# EAGLE board stepone_v1 (EAGLE 6.4)
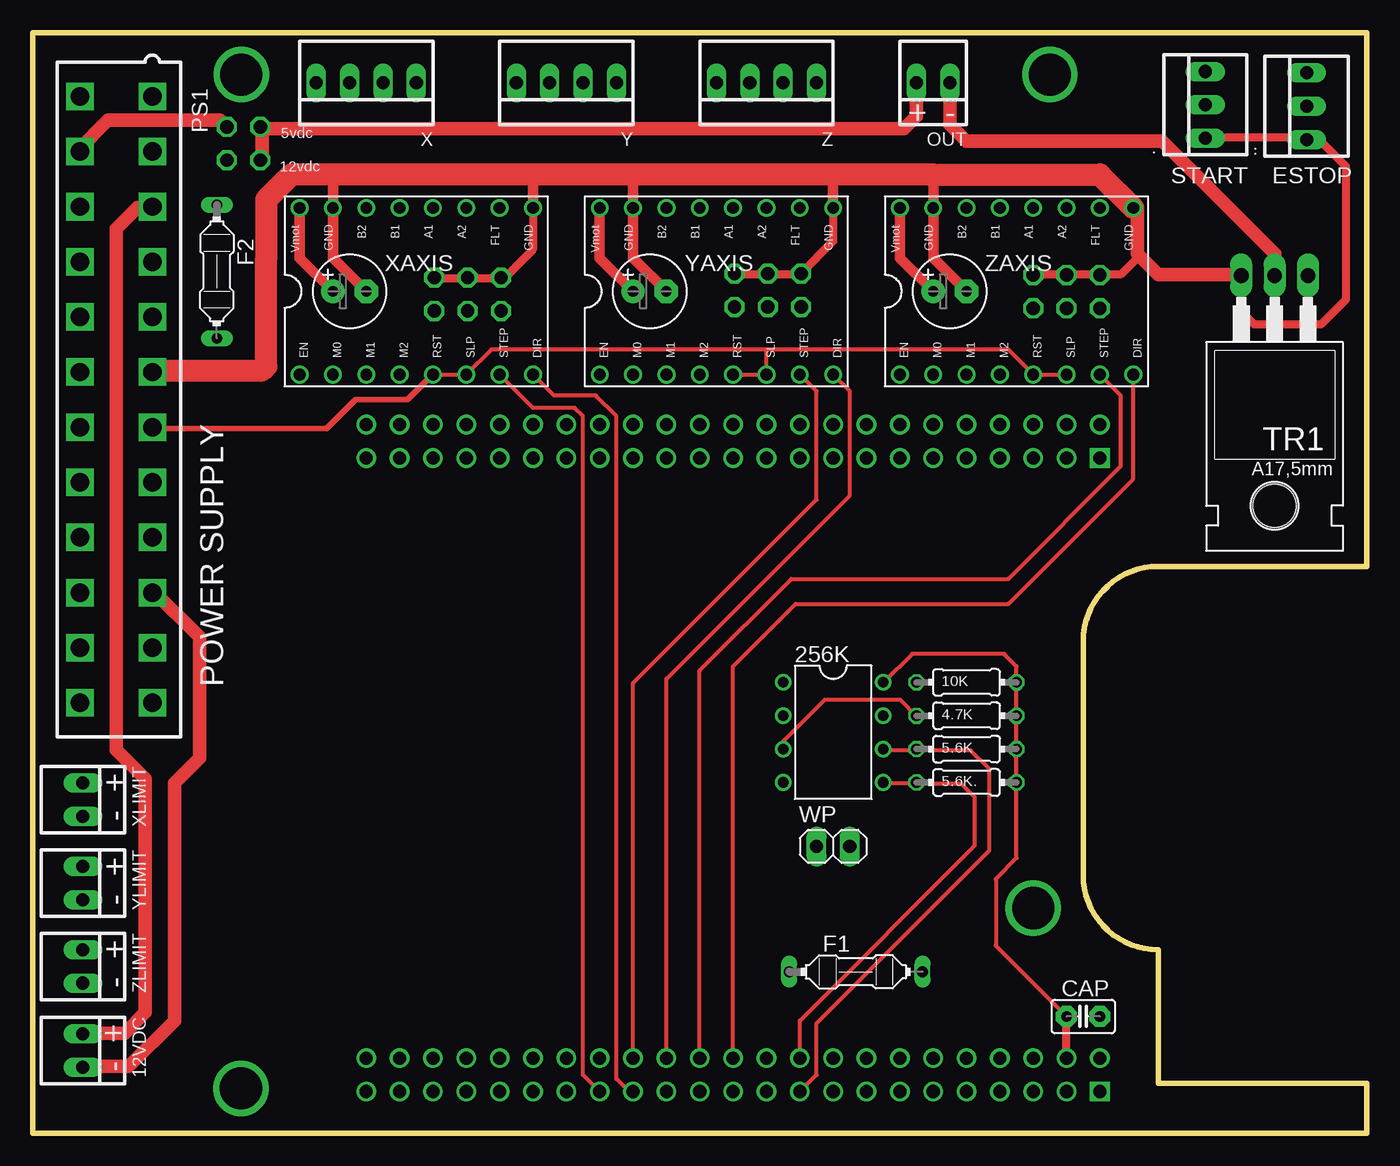
[diagram p0: board, top side]
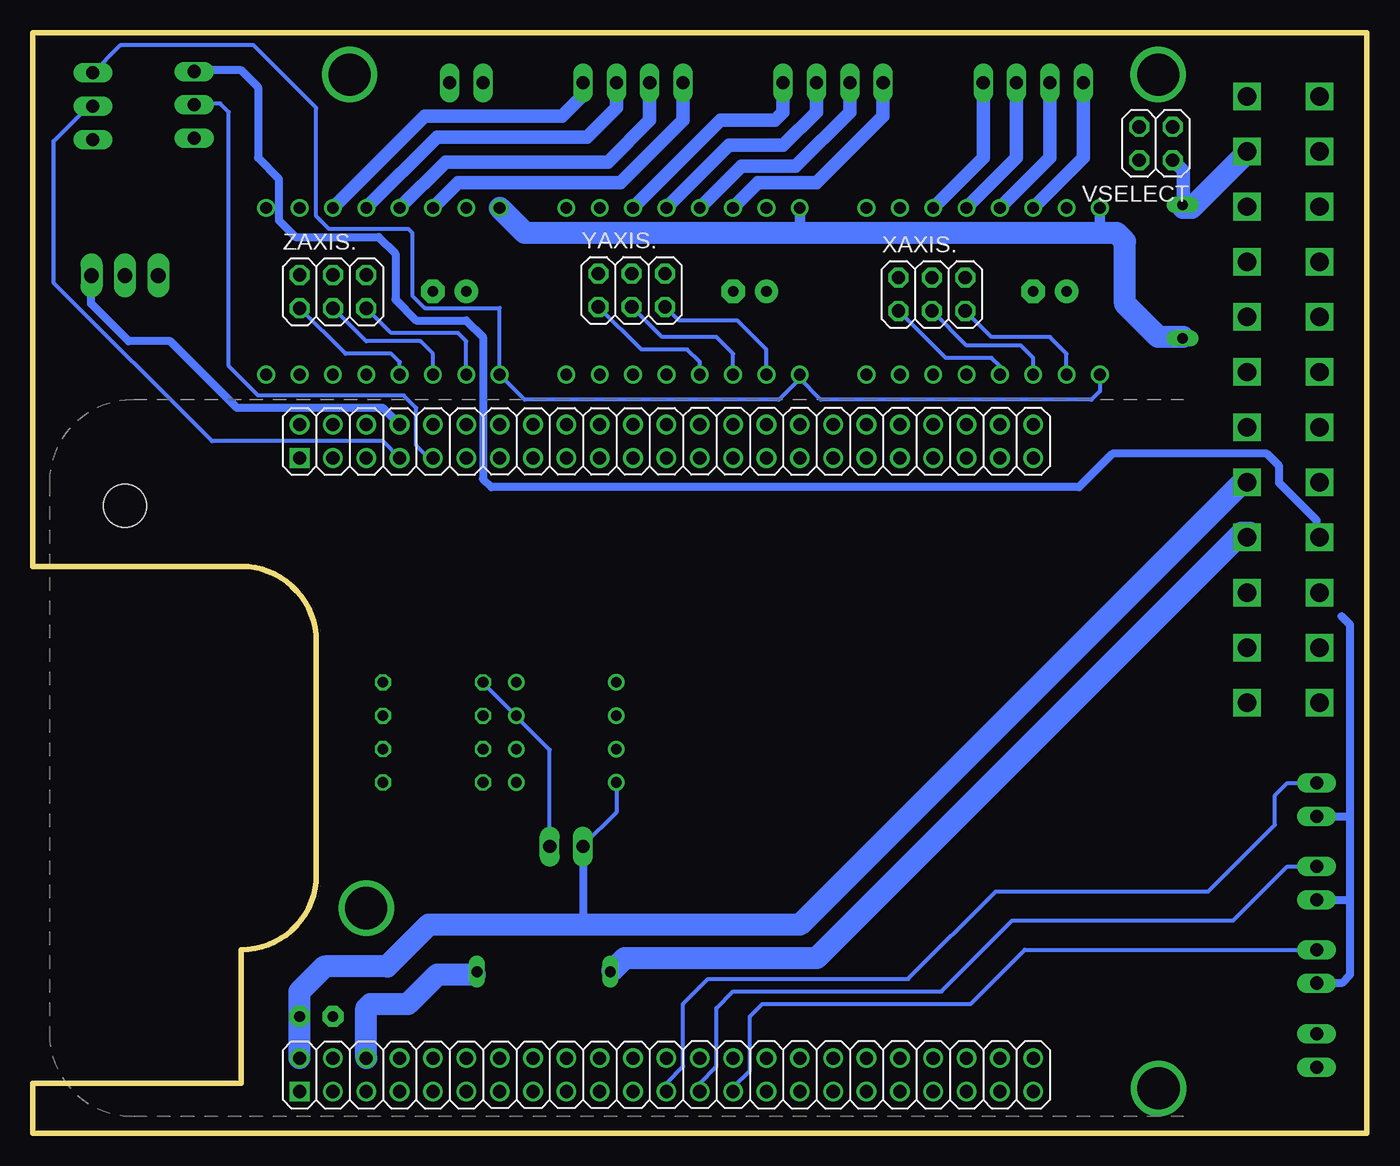
[diagram p1: board, bottom side, seen from below]

Size 101.6 x 83.82 mm. Coordinates in mm from the lower left corner, seen from the top.
Outline: 101.6,3.81 101.6,0 0,0 0,83.82 101.6,83.82 101.6,43.18
Copper layers (1*16): Top 0.0356mm / dielectric 1.5011mm / Bottom 0.0356mm
Design rules "LaenPCBOrder": minimum track width 6mil, minimum drill 13mil, track to track 6mil, track to pad 6mil, pad to pad 6mil, via to via 6mil, smd to smd 6mil, copper to edge 15mil, drill to drill 6mil, minimum pad ring 7mil, minimum via ring 7mil, stop-mask expansion 3mil, vias tented up to drill 0mil, thermal gap 10mil

## Footprints (pad centres in the part's own frame; a part is rotated, then mirrored left to right if it is on the bottom)
0204/7 = drill 0.813 octagon: 1 -3.81,0; 2 3.81,0
22-23-2021 = drill 1 long: 1 -1.27,0; 2 1.27,0
DIL08 = drill 0.813 pad 1.27: 1 -3.81,-3.81; 2 -1.27,-3.81; 3 1.27,-3.81; 4 3.81,-3.81; 5 3.81,3.81; 6 1.27,3.81; 7 -1.27,3.81; 8 -3.81,3.81
22-23-2031 = drill 1 long: 1 -2.54,0; 2 0,0; 3 2.54,0
C2.5-2 = drill 0.813 pad 1.6 octagon: 1 -1.27,0; 2 1.27,0
A4988BREAKOUT = drill 0.9: 1A 8.89,1.27; 1B 11.43,1.27; 2A 6.35,1.27; 2B 3.81,1.27; DIR 16.51,-11.43; EN -1.27,-11.43; GND 16.51,1.27; GND@0 1.27,1.27; MS1 1.27,-11.43; MS2 3.81,-11.43; MS3 6.35,-11.43; RST 8.89,-11.43; SLP 11.43,-11.43; STEP 13.97,-11.43; VDD 13.97,1.27; VMOT -1.27,1.27
BEAGLEBONE_SHIELD = drill 1 square: 1 -30.48,57.785; 47 -30.48,9.525 | drill 1: 2 -30.48,60.325; 3 -33.02,57.785; 4 -33.02,60.325; 5 -35.56,57.785; 6 -35.56,60.325; 7 -38.1,57.785; 8 -38.1,60.325; 9 -40.64,57.785; 10 -40.64,60.325; 11 -43.18,57.785; 12 -43.18,60.325; 13 -45.72,57.785; 14 -45.72,60.325; 15 -48.26,57.785; 16 -48.26,60.325; 17 -50.8,57.785; 18 -50.8,60.325; 19 -53.34,57.785; 20 -53.34,60.325; 21 -55.88,57.785; 22 -55.88,60.325; 23 -58.42,57.785; 24 -58.42,60.325; 25 -60.96,57.785; 26 -60.96,60.325; 27 -63.5,57.785; 28 -63.5,60.325; 29 -66.04,57.785; 30 -66.04,60.325; 31 -68.58,57.785; 32 -68.58,60.325; 33 -71.12,57.785; 34 -71.12,60.325; 35 -73.66,57.785; 36 -73.66,60.325; 37 -76.2,57.785; 38 -76.2,60.325; 39 -78.74,57.785; 40 -78.74,60.325; 41 -81.28,57.785; 42 -81.28,60.325; 43 -83.82,57.785; 44 -83.82,60.325; 45 -86.36,57.785; 46 -86.36,60.325; 48 -30.48,12.065; 49 -33.02,9.525; 50 -33.02,12.065; 51 -35.56,9.525; 52 -35.56,12.065; 53 -38.1,9.525; 54 -38.1,12.065; 55 -40.64,9.525; 56 -40.64,12.065; 57 -43.18,9.525; 58 -43.18,12.065; 59 -45.72,9.525; 60 -45.72,12.065; 61 -48.26,9.525; 62 -48.26,12.065; 63 -50.8,9.525; 64 -50.8,12.065; 65 -53.34,9.525; 66 -53.34,12.065; 67 -55.88,9.525; 68 -55.88,12.065; 69 -58.42,9.525; 70 -58.42,12.065; 71 -60.96,9.525; 72 -60.96,12.065; 73 -63.5,9.525; 74 -63.5,12.065; 75 -66.04,9.525; 76 -66.04,12.065; 77 -68.58,9.525; 78 -68.58,12.065; 79 -71.12,9.525; 80 -71.12,12.065; 81 -73.66,9.525; 82 -73.66,12.065; 83 -76.2,9.525; 84 -76.2,12.065; 85 -78.74,9.525; 86 -78.74,12.065; 87 -81.28,9.525; 88 -81.28,12.065; 89 -83.82,9.525; 90 -83.82,12.065; 91 -86.36,9.525; 92 -86.36,12.065
PICOFUSE = drill 0.813 long: 1 -5.08,0; 2 5.08,0
5566-24 = drill 1.4 square: 1 23.1,-2.75; 2 18.9,-2.75; 3 14.7,-2.75; 4 10.5,-2.75; 5 6.3,-2.75; 6 2.1,-2.75; 7 -2.1,-2.75; 8 -6.3,-2.75; 9 -10.5,-2.75; 10 -14.7,-2.75; 11 -18.9,-2.75; 12 -23.1,-2.75; 13 23.1,2.75; 14 18.9,2.75; 15 14.7,2.75; 16 10.5,2.75; 17 6.3,2.75; 18 2.1,2.75; 19 -2.1,2.75; 20 -6.3,2.75; 21 -10.5,2.75; 22 -14.7,2.75; 23 -18.9,2.75; 24 -23.1,2.75
TO220AH = drill 1.118 long: B -2.54,-6.35; C 0,-6.35; E 2.54,-6.35 | hole 3.302: 0,11.176
2X02 = drill 1.016 octagon: 1 -1.27,-1.27; 2 -1.27,1.27; 3 1.27,-1.27; 4 1.27,1.27
1X02 = drill 1.016 long: 1 -1.27,0; 2 1.27,0
22-23-2041 = drill 1 long: 1 -3.81,0; 2 -1.27,0; 3 1.27,0; 4 3.81,0
E2,5-6 = drill 0.813 pad 1.778: + -1.27,0 | drill 0.813 pad 1.778 octagon: - 1.27,0
2X03 = drill 1.016 octagon: 1 -2.54,-1.27; 2 -2.54,1.27; 3 0,-1.27; 4 0,1.27; 5 2.54,-1.27; 6 2.54,1.27

## Placement (x,y rotation side)
4.7K  [0204/7]  71.12,31.8 0 top
5.6K  [0204/7]  71.12,29.26 0 top
5.6K.  [0204/7]  71.12,26.72 0 top
10K  [0204/7]  71.12,34.34 0 top
12VDC  [22-23-2021]  3.81,6.3 270 top
256K  [DIL08]  60.96,30.53 270 top
.  [22-23-2031]  89.31,78.33 90 top
..  [22-23-2031]  97.03,78.23 90 top
CAP  [C2.5-2]  80.01,8.89 0 top
DRVX  [A4988BREAKOUT]  21.59,69.22 0 top
DRVY  [A4988BREAKOUT]  44.45,69.22 0 top
DRVZ  [A4988BREAKOUT]  67.31,69.22 0 top
E$1  [BEAGLEBONE_SHIELD]  111.76,-6.35 0 top
F1  [PICOFUSE]  62.69,12.29 0 top
F2  [PICOFUSE]  14.02,65.63 270 top
OUT  [22-23-2021]  68.58,80.01 180 top
PS1  [5566-24]  6.35,55.88 90 top
TR1  [TO220AH]  94.59,58.98 180 top
VSELECT  [2X02]  16.05,75.39 180 bottom
WP  [1X02]  60.96,21.84 0 top
X  [22-23-2041]  25.4,80.01 180 top
XAXIS  [E2,5-6]  24.13,64.14 0 top
XAXIS.  [2X03]  33.12,63.91 0 bottom
XLIMIT  [22-23-2021]  3.81,25.4 270 top
Y  [22-23-2041]  40.64,80.01 180 top
YAXIS  [E2,5-6]  46.99,64.14 0 top
YAXIS.  [2X03]  55.98,64.21 0 bottom
YLIMIT  [22-23-2021]  3.81,19.05 270 top
Z  [22-23-2041]  55.88,80.01 180 top
ZAXIS  [E2,5-6]  69.85,64.14 0 top
ZAXIS.  [2X03]  78.74,64.11 0 bottom
ZLIMIT  [22-23-2021]  3.81,12.7 270 top

## Library data of the parts
4.7K 5.6K 5.6K. 10K = resistor2
12VDC . .. OUT PS1 X XLIMIT Y YLIMIT Z ZLIMIT = con-molex
256K = national-semiconductor
CAP = capacitor-wima
DRVX DRVY DRVZ = stamper
E$1 XAXIS YAXIS ZAXIS = adafruit2
F1 F2 = fuse
TR1 = transistor-power
VSELECT WP XAXIS. YAXIS. ZAXIS. = pinhead

## Nets
S$5: DRVX.2B X.4
S$6: DRVX.2A X.3
S$7: DRVX.1A X.2
S$8: DRVX.1B X.1
S$9: DRVY.2B Y.4
S$10: DRVY.1B Y.1
S$11: E$1.7
S$13: DRVZ.2B Z.4
S$14: DRVZ.2A Z.3
S$15: DRVZ.1A Z.2
S$16: DRVZ.1B Z.1
S$17: DRVX.GND DRVX.GND@0 DRVY.GND DRVY.GND@0 DRVZ.GND DRVZ.GND@0 XAXIS.- YAXIS.- ZAXIS.-
S$18: DRVX.VMOT DRVY.VMOT DRVZ.VMOT XAXIS.+ YAXIS.+ ZAXIS.+
S$20: CAP.2 E$1.48
S$21: DRVX.RST DRVX.SLP DRVY.RST DRVY.SLP DRVZ.RST DRVZ.SLP
S$22: CAP.1 E$1.50
S$25: E$1.65
S$27: DRVX.EN DRVZ.EN
S$30: DRVZ.MS1
S$31: DRVY.STEP E$1.76
S$32: E$1.66
S$34: OUT.1
S$35: E$1.70
S$36: DRVZ.STEP E$1.72
S$37: DRVY.DIR E$1.74
S$38: E$1.8
S$39: XLIMIT.2 YLIMIT.2 ZLIMIT.2
S$40: DRVX.DIR
S$41: DRVX.STEP E$1.77
S$42: DRVX.MS1
S$44: DRVX.MS2
S$45: DRVX.MS3
S$47: DRVY.MS1
S$50: DRVY.MS3
S$51: E$1.52
S$52: E$1.71
S$53: E$1.73
S$54: DRVY.2A Y.3
S$55: DRVY.1A Y.2
S$56: DRVZ.MS3
S$58: OUT.2

## Tracks (layer width: path | path; a pad name or v marks a point on that pad's centre or on a via)
S$1  (via drill 3.2)
  other vias: 77.47,80.64
S$2  (via drill 3.2)
  other vias: 15.88,80.64
S$3  (via drill 3.2)
  other vias: 15.85,3.4
S$4  (via drill 3.2)
  other vias: 76.2,17.14
S$5
  Bottom 1.016: DRVX.2B 21.59,74.3 X.4
S$6
  Bottom 1.016: DRVX.2A 24.13,74.3 X.3
S$7
  Bottom 1.016: DRVX.1A 26.67,74.3 X.2
S$8
  Bottom 1.016: DRVX.1B 29.21,74.3 X.1
S$9
  Bottom 1.016: DRVY.2B 46.35,72.39 41.91,72.39 36.83,77.47 Y.4
S$10
  Bottom 1.016: DRVY.1B 49.21,77.15 45.09,77.15 44.45,77.79 Y.1
S$11
  Bottom 0.305: E$1.7 74.93,52.7 87.95,52.7 100.01,64.77 100.01,75.56 97.16,78.42
S$12
  Top 0.61: 84.14,66.99 84.14,66.67 82.87,65.41 76.2,65.41
  Top 1.016: 84.14,70.17 84.14,66.99 85.72,65.41 92.08,65.41
S$13
  Bottom 1.016: DRVZ.2B 69.22,72.39 56.83,72.39 52.07,77.15 Z.4
S$14
  Bottom 1.016: DRVZ.2A 70.17,73.98 57.78,73.98 54.61,77.15 Z.3
S$15
  Bottom 1.016: DRVZ.1A 70.8,75.88 59.37,75.88 57.15,78.11 Z.2
S$16
  Bottom 1.016: DRVZ.1B 71.75,77.47 61.28,77.47 59.69,79.06 Z.1
S$17
  Top 0.61: DRVZ.GND 83.82,70.8 | DRVX.GND 38.1,67.31 35.88,65.09 30.48,65.09 | DRVY.GND 60.96,67.94 58.42,65.41 53.66,65.41 53.34,65.72
  Top 0.813: 22.86,73.03 DRVX.GND@0 22.86,66.67 XAXIS.- | DRVX.GND 38.1,73.03 | 45.72,73.03 DRVY.GND@0 45.72,66.67 YAXIS.- | DRVY.GND 60.96,73.03 | 68.58,73.03 DRVZ.GND@0 68.58,66.67 ZAXIS.-
  Top 1.676: DRVZ.GND 81.28,73.03 68.58,73.03 60.96,73.03 45.72,73.03 38.1,73.03 22.86,73.03 19.68,73.03 17.78,71.12 17.78,66.99 17.78,66.67 17.78,58.42 17.46,58.1 8.89,58.1
S$18
  Top 0.813: DRVX.VMOT 20.32,66.67 XAXIS.+ | DRVZ.VMOT 66.04,66.67 ZAXIS.+ | DRVY.VMOT 43.18,66.67 YAXIS.+
  Bottom 0.813: DRVX.VMOT 20.32,68.58 | 43.18,68.58 DRVY.VMOT
  Bottom 1.676: DRVZ.VMOT 64.14,68.58 43.18,68.58 20.32,68.58 19.05,68.58 18.41,67.94 18.41,63.18 15.88,60.64 13.97,60.64
S$19
  Bottom 1.676: 8.89,45.72 9.53,45.72 41.91,13.34 56.52,13.34 57.47,12.38
S$20
  Bottom 1.676: 9.53,49.53 43.18,15.88 71.44,15.88 74.61,12.7 79.38,12.7 81.28,10.79 CAP.2 E$1.48
S$21
  Top 0.305: DRVZ.SLP DRVZ.RST 74.3,59.69 55.88,59.69 | 55.88,59.69 34.92,59.69 DRVX.SLP DRVX.RST | DRVY.RST DRVY.SLP 55.88,59.69
S$22
  Top 0.305: 64.77,34.29 66.99,36.51 73.98,36.51 74.93,35.56 74.93,20.95 73.34,19.37 73.34,14.29 CAP.1
  Top 0.61: E$1.50 CAP.1
S$23
  Bottom 0.305: 57.15,26.99 57.15,24.45 59.69,21.91
  Bottom 0.61: 59.69,21.91 59.69,16.51
S$24
  Bottom 0.305: 62.23,21.91 62.23,29.21 67.31,34.29
S$25
  Top 0.305: 64.77,29.21 67.31,29.21 67.36,29.16 71.42,29.16 72.85,27.74 72.85,21.54 59.69,8.38 59.69,4.45 E$1.65
S$26
  Top 0.305: 64.77,26.67 67.31,26.67
S$27
  Bottom 0.305: 97.16,80.64 94.93,82.87 84.77,82.87 80.01,78.11 80.01,69.85 79.06,68.9 73.03,68.9 72.71,68.58 72.71,63.82 71.75,62.87 66.04,62.87 DRVZ.EN 64.14,55.88 44.77,55.88 43.18,57.47 41.59,55.88 20.95,55.88 20.32,56.52 DRVX.EN
S$28
  Top 0.305: 57.15,29.53 57.15,29.84 60.33,33.02 66.04,33.02 67.31,31.75
S$29
  Bottom 0.61: 3.81,45.4 3.81,46.67 6.67,49.53 6.67,50.8 7.62,51.75 19.37,51.75 21.91,49.21 66.67,49.21 67.31,49.85 67.31,60.64 68.58,61.91 72.39,61.91 73.98,63.5 73.98,66.99 75.25,68.26 81.6,68.26 82.87,69.53 82.87,72.71 84.45,74.3 84.45,79.69 85.72,80.96 89.22,80.96
S$30
  Bottom 0.305: DRVZ.MS1 68.58,60.33 69.22,60.96 74.3,60.96 76.2,62.87
S$31
  Top 0.305: E$1.76 45.72,34.29 59.69,48.26 59.69,56.52 DRVY.STEP
S$32
  Top 0.305: E$1.66 58.42,8.57 71.75,21.91 71.75,25.58 70.71,26.62 67.36,26.62 67.26,26.72
S$34
  Top 1.016: 94.61,65.41 94.61,66.99 86.04,75.56 71.12,75.56 69.85,76.83 OUT.1
S$35
  Top 0.305: E$1.70 53.34,35.56 58.1,40.32 74.3,40.32 83.82,49.85 83.82,58.1
S$36
  Top 0.305: E$1.72 50.8,35.24 57.78,42.23 74.3,42.23 82.87,50.8 82.87,56.2 DRVZ.STEP
S$37
  Top 0.305: E$1.74 48.26,34.61 62.23,48.58 62.23,56.52 DRVY.DIR
S$38
  Bottom 0.61: E$1.8 74.93,55.24 86.04,55.24 91.12,60.33 94.3,60.33 97.16,63.18 97.16,65.41
S$39
  Bottom 0.61: 1.91,39.37 1.27,38.73 1.27,24.13 | 1.27,24.13 1.27,17.78 | 1.27,17.78 1.27,12.06 1.91,11.43 ZLIMIT.2 | YLIMIT.2 1.27,17.78 | XLIMIT.2 1.27,24.13
S$40
  Top 0.305: DRVX.DIR 39.69,56.2 42.86,56.2 44.45,54.61 44.45,4.13 45.72,2.86
S$41
  Top 0.305: DRVX.STEP 38.1,55.24 41.27,55.24 41.91,54.61 41.91,4.45 E$1.77
S$42
  Bottom 0.305: 30.8,62.87 28.57,60.64 24.13,60.64 22.86,59.37 DRVX.MS1
S$43
  Bottom 0.305: 71.12,51.12 72.39,52.39 72.39,55.24 73.34,56.2 84.45,56.2 86.68,58.42 86.68,77.79 87.31,78.42 89.22,78.42
S$44
  Bottom 0.305: DRVX.MS2 25.4,59.05 26.35,60.01 30.48,60.01 33.02,62.55
S$45
  Bottom 0.305: DRVX.MS3 27.94,58.42 28.57,59.05 32.07,59.05 35.56,62.55
S$46
  Bottom 0.305: 71.12,58.1 71.12,59.37 72.07,60.33 76.2,60.33 78.74,62.87
S$47
  Bottom 0.305: DRVY.MS1 45.72,59.69 47.94,61.91 52.39,61.91 53.34,62.87
S$48
  Bottom 0.305: 48.26,57.47 48.26,59.37 49.53,60.64 53.66,60.64 55.88,62.87
S$49
  Bottom 0.305: 53.34,2.86 53.34,3.81 52.07,5.08 52.07,9.84 50.16,11.75 34.92,11.75 28.26,18.41 12.06,18.41 6.99,23.5 6.99,25.72 6.03,26.67 3.49,26.67
S$50
  Bottom 0.305: DRVY.MS3 50.8,58.74 51.75,59.69 55.24,59.69 58.42,62.87
S$51
  Bottom 1.676: E$1.52 76.2,9.53
S$52
  Bottom 0.305: E$1.71 50.8,3.81 49.53,5.08 49.53,9.53 48.26,10.79 32.38,10.79 26.99,16.19 10.16,16.19 6.03,20.32 3.49,20.32
S$53
  Bottom 0.305: E$1.73 48.26,3.49 46.99,4.76 46.99,8.89 46.04,9.84 30.16,9.84 26.04,13.97 4.13,13.97
S$54
  Bottom 1.016: DRVY.2A 47.62,73.66 43.5,73.66 39.37,77.79 Y.3
S$55
  Bottom 1.016: DRVY.1A 48.58,75.25 44.45,75.25 41.91,77.79 Y.2
S$56
  Bottom 0.305: DRVZ.MS3 73.66,58.74 74.3,59.37 77.79,59.37 81.28,62.87
S$57
  Top 0.61: 89.53,75.88 97.79,75.88 100.01,73.66 100.01,63.5 98.11,61.59 93.03,61.59 92.08,62.55 92.08,65.09
S$58
  Top 1.016: OUT.2 67.31,77.47 66.99,77.15 66.67,76.83 66.36,76.52 17.46,76.52 17.46,74.3
S$61
  Bottom 1.676: 75.88,9.84 73.03,9.84 70.8,12.06 67.94,12.06
S$62
  Top 1.016: 9.21,70.48 7.94,70.48 6.35,68.9 6.35,29.21 8.57,26.99 8.57,9.21 6.99,7.62 3.81,7.62
S$63
  Top 1.016: 3.81,5.08 7.3,5.08 10.79,8.57 10.79,26.67 12.7,28.57 12.7,37.78 9.21,41.27
S$64
  Top 1.016: 3.49,74.93 5.71,77.15 14.29,77.15 14.92,76.52
S$65
  Top 0.406: 8.89,53.66 22.36,53.66 24.59,55.88 28.55,55.88 30.58,57.91
S$66
  Bottom 1.016: 13.97,70.8 13.97,73.3 14.83,74.17
S$67
  Bottom 1.676: 13.97,70.48 13.34,70.48 9.21,74.61

## Text on the board
tNames: + - | 5vdc | 12vdc | START | ESTOP | POWER SUPPLY | - + | - + | - + | - +
bValues: DPE v1.0